# Altium PCB group11-3.PcbDoc
Units mm, origin at the board's own origin, x right, y up, seen from the top; angles counter-clockwise.
Board outline 87.88 x 127 mm, 2 copper layers (Top Layer, Bottom Layer); 48 components, 22 nets, 158 pads, 0 vias.
Unrouted connection lines stored in the file: 11.
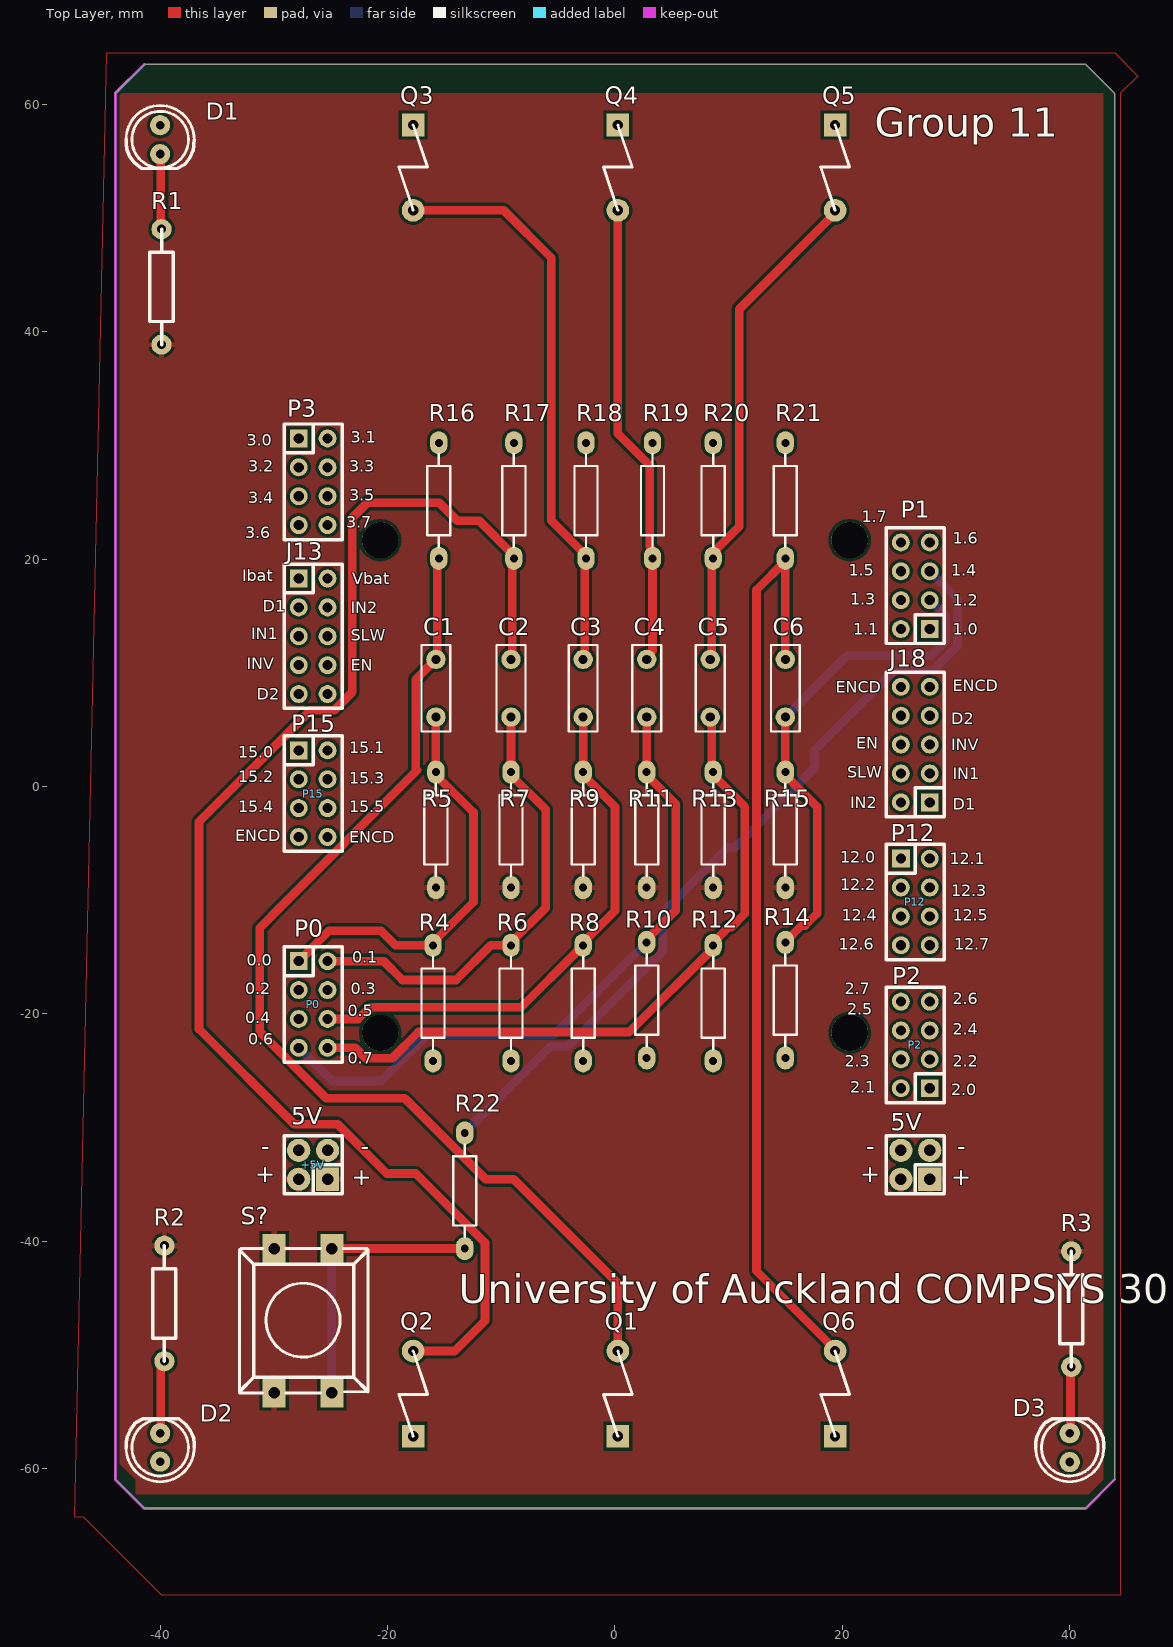
[diagram p0: Top Layer view]
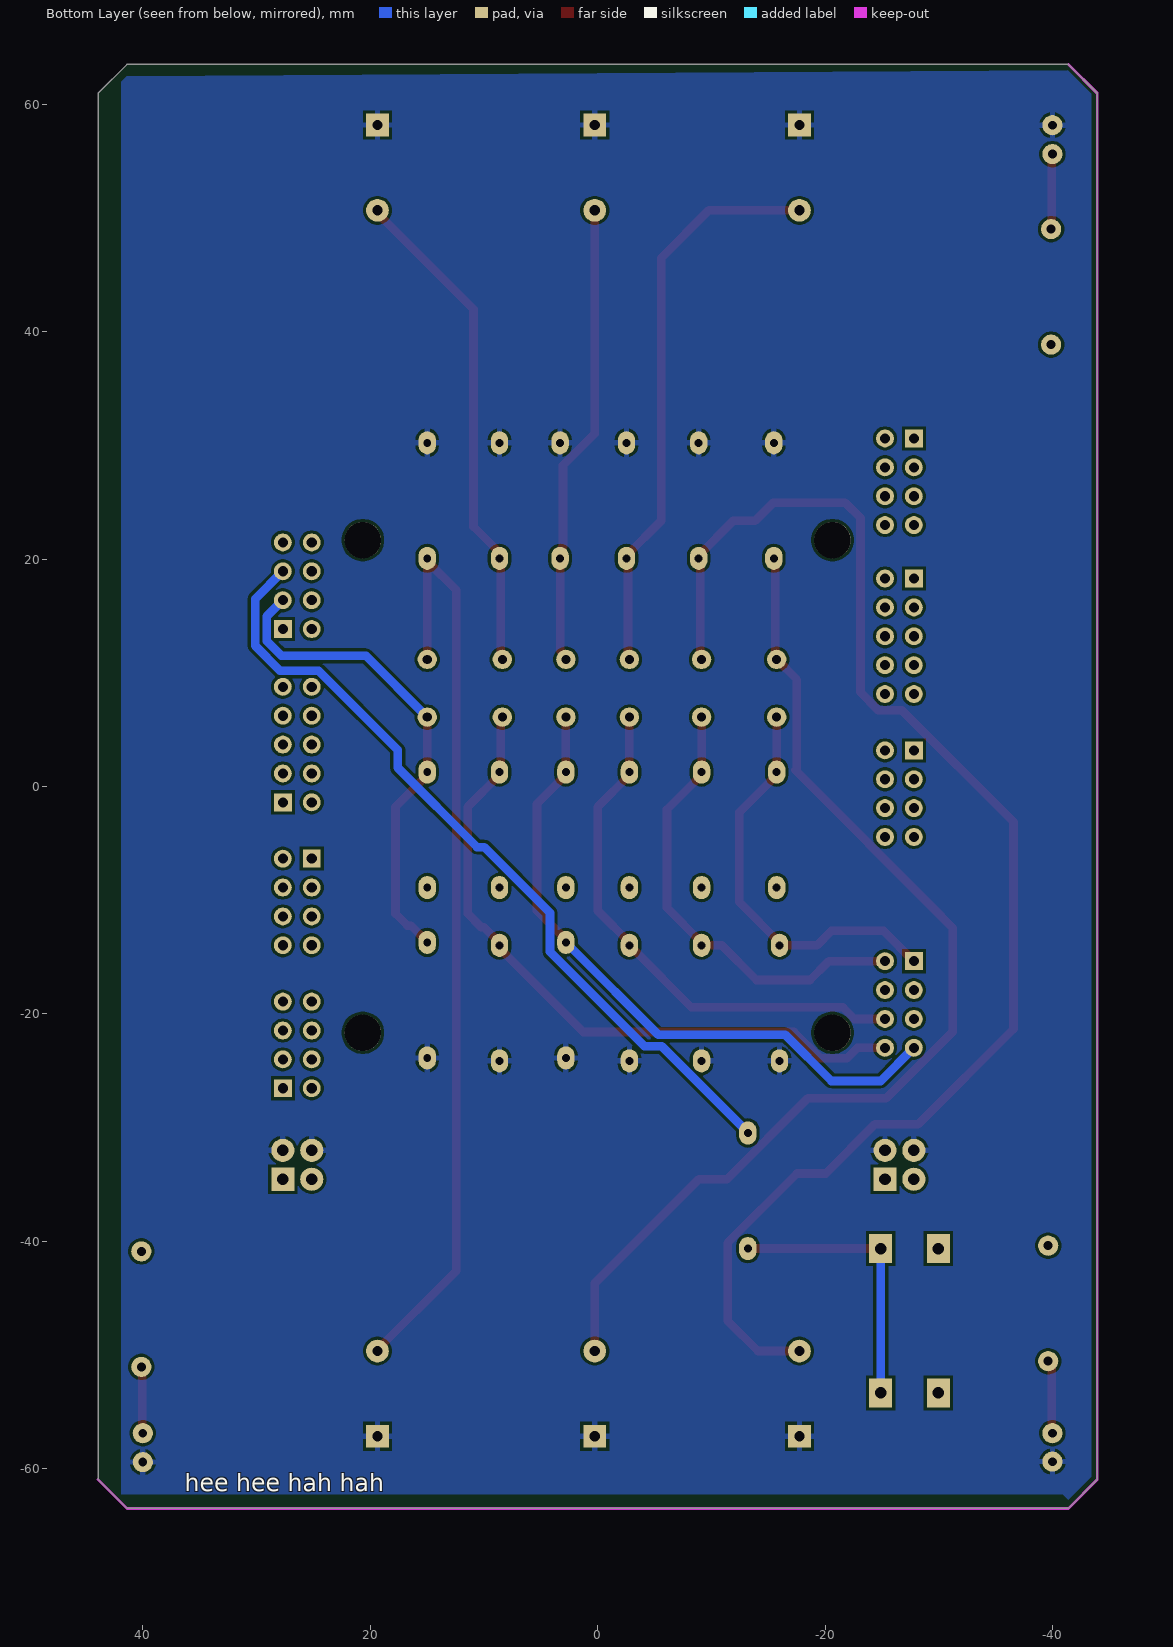
[diagram p1: Bottom Layer view, seen from below]

## Layer stack, top to bottom
Top Solder: solder mask 0.0102, Solder Resist, Dk 3.5
Top Layer: signal copper 0.0356
Dielectric1: dielectric 0.32, FR-4, Dk 4.8
Bottom Layer: signal copper 0.0356
Bottom Solder: solder mask 0.0102, Solder Resist, Dk 3.5

## Board outline
-43.942,-60.96 -41.402,-63.5 41.402,-63.5 43.942,-60.96 43.942,60.96 41.402,63.5 -41.402,63.5 -43.942,60.96

## Design rules (kind name [scope] priority, off if disabled: settings)
Clearance [All] p1: gap=0.254 ignorepadtopadclearanceinfootprint=FALSE except(0: Arc-Hole Track-Hole SMDPad-Hole THPad-Hole Via-Hole Fill-Hole Poly-Hole Region-Hole Text-Hole)
PolygonConnect [All] p1: connectstyle=Relief reliefconductorwidth=0.508 reliefentries=4 polygonreliefangle="90 Angle" airgapwidth=0.254
RoomDefinition cs301_YourGroupNumber--------------- [InComponentClass('cs301_YourGroupNumber---------------')] p1: confinementstyle=ConfineIn formatcopy=TRUE lockcomponents=FALSE outline 171.244,-65.956 182.928,-65.956 182.928,-50.716 171.244,-50.716
RoutingVias [All] p1: holewidth=0.711 width=1.27 viastyle="Through Hole" minholewidth=0.711 minwidth=1.27 maxholewidth=0.711 maxwidth=1.27
SilkToSolderMaskClearance SilkscreenOverComponentPads [IsPad] p1: minsilkscreentomaskgap=0.254 clearancetoexposedcopper=TRUE
SolderMaskExpansion [All] p1: expansion=0.102 istentingtop=FALSE
Width [All] p1: maxlimit=0.762 minlimit=0.254 preferedwidth=0.254 minimp=50.000000 maximp=50.000000 favimp=50.000000
29 further rules are at their usual default settings.

## Components (designator, comment, footprint, x,y, rotation, side; value= is the part's Value field where it differs from the comment)
5V "5V" IDC4 27.686,-34.544 r90 top locked
+5V "5V" IDC4 -25.273,-34.544 r90 top locked
C1 "*" ece-RAD0.2 -15.748,6.096 r90 top
C2 "*" ece-RAD0.2 -9.144,6.096 r90 top
C3 "*" ece-RAD0.2 -2.794,6.096 r90 top
C4 "*" ece-RAD0.2 2.794,6.096 r90 top
C5 "*" ece-RAD0.2 8.382,6.096 r90 top
C6 "*" ece-RAD0.2 14.986,6.096 r90 top
D1 "LED" LED0.1/5MM#1 -40,55.62 r180 top locked
D2 "LED" LED0.1/5MM#2 -40,-56.88 r0 top locked
D3 "LED" LED0.1/5MM#1 40,-56.88 r0 top locked
J13 "CON10" IDC10 -27.813,18.288 r270 top locked
J18 "CON10" IDC10 27.686,-1.397 r90 top locked
P0 "P0" idc8 -27.813,-15.367 r270 top locked
P1 "P1" idc8 27.686,13.843 r90 top locked
P2 "P2" idc8 27.686,-26.543 r90 top locked
P3 "P3" idc8 -27.813,30.607 r270 top locked
P12 "P12" idc8 25.146,-6.35 r270 top locked
P15 "P15" IDC8 -27.813,3.175 r270 top locked
Q1 "VEMT3700" VEMT3700 4.064,-59.69 r90 top
Q2 "VEMT3700" VEMT3700 -13.936,-59.69 r90 top
Q3 "VEMT3700" VEMT3700 -21.556,60.706 r270 top
Q4 "VEMT3700" VEMT3700 -3.556,60.706 r270 top
Q5 "VEMT3700" VEMT3700 15.556,60.706 r270 top
Q6 "VEMT3700" VEMT3700 23.176,-59.69 r90 top
R1 "RES2" AXIAL0.4 -39.878,49.022 r270 top
R2 "RES2" AXIAL0.4 -39.624,-50.546 r90 top
R3 "RES2" AXIAL0.4 40.132,-40.894 r270 top
R4 "*" ece-AXIAL0.4 -16.002,-19.05 r90 top
R5 "*" ece-AXIAL0.4 -15.748,-3.81 r270 top
R6 "*" ece-AXIAL0.4 -9.144,-19.05 r270 top
R7 "*" ece-AXIAL0.4 -9.144,-3.81 r270 top
R8 "*" ece-AXIAL0.4 -2.794,-19.05 r270 top
R9 "*" ece-AXIAL0.4 -2.794,-3.81 r270 top
R10 "*" ece-AXIAL0.4 2.794,-18.796 r270 top
R11 "*" ece-AXIAL0.4 2.794,-3.81 r270 top
R12 "*" ece-AXIAL0.4 8.636,-19.05 r270 top
R13 "*" ece-AXIAL0.4 8.636,-3.81 r270 top
R14 "*" ece-AXIAL0.4 14.986,-18.796 r270 top
R15 "*" ece-AXIAL0.4 14.986,-3.81 r270 top
R16 "*" ece-AXIAL0.4 -15.494,25.146 r270 top
R17 "*" ece-AXIAL0.4 -8.89,25.146 r270 top
R18 "*" ece-AXIAL0.4 -2.54,25.146 r270 top
R19 "*" ece-AXIAL0.4 3.302,25.146 r270 top
R20 "*" ece-AXIAL0.4 8.636,25.146 r270 top
R21 "*" ece-AXIAL0.4 14.986,25.146 r270 top
R22 "*" ece-AXIAL0.4 -13.208,-35.56 r90 top
S? "SW-PB" SW-PB -30.48,-50.8 r90 top

## Footprints (in the part's own frame and the unit in brackets; to place one, negate y for a bottom-side part, rotate by r counter-clockwise, add the part's x,y. Pads: shape width x height; smd on the part's side, far side on the other; paste and mask are expansions set on the pad)
AXIAL0.4 [mil]
  round 70 hole 31: 1(0,0) 2(400,0)
  silkscreen extent 0,-40 400,40
ece-AXIAL0.4 [mil]
  oval 80x60 hole 27.56: 1(-200,0) 2(200,0)
  silkscreen extent -160,-40 160,40
ece-RAD0.2 [mm]
  round 1.7 hole 0.8: 1(0,0) 2(5.08,0)
  silkscreen extent -1.27,-1.27 6.35,1.27
IDC4 [mil]
  rect 80x80 hole 40: 1(0,0)
  round 80 hole 40: 2(0,100) 3(100,0) 4(100,100)
  silkscreen extent -50,-50 150,150
idc8 [mil]
  rect 62x62 hole 35: 1(0,0)
  round 62 hole 35: 2(0,100) 3(100,0) 4(100,100) 5(200,0) 6(200,100) 7(300,0) 8(300,100)
  silkscreen extent -50,-50 350,150
IDC8 [mil]
  rect 62x62 hole 35: 1(0,0)
  round 62 hole 35: 2(0,100) 3(100,0) 4(100,100) 5(200,0) 6(200,100) 7(300,0) 8(300,100)
  silkscreen extent -50,-50 350,150
IDC10 [mil]
  rect 62x62 hole 35: 1(0,0)
  round 62 hole 35: 2(0,100) 3(100,0) 4(100,100) 5(200,0) 6(200,100) 7(300,0) 8(300,100) 9(400,0) 10(400,100)
  silkscreen extent -50,-50 450,150
LED0.1/5MM#1 [mil]
  round 70 hole 30: A(0,0) K(0,-100)
  silkscreen extent -118,-168 118,50
LED0.1/5MM#2 [mil]
  round 70 hole 30: A(0,0) K(0,-98.43)
  silkscreen extent -118,-168 118,50
SW-PB [mil]
  rect 100x80 hole 40: 1(-100,-20) 1(400,-20) 2(-100,-220) 2(400,-220)
  silkscreen extent -100,-345 400,100
VEMT3700 [mm]
  rect 2x2 hole 0.9: 1(2.54,3.81)
  round 2 hole 0.9: 2(10.033,3.81)
  silkscreen extent 2.54,2.54 10.03,5.08

## Part data
5V +5V: library part CON4, "Connector"
C1 C2 C3 C4 C5 C6: library part CAP, "Capacitor Non Polarised Through Hole"
J13 J18: "Connector"
P0 P1 P2 P3: library part CON8, "Connector"
P12 P15: library part CON8_1, "Connector"
Q1 Q2 Q3 Q4 Q5 Q6: "Silicon NPN Phototransistor"
R4 R5 R6 R7 R8 R9 R10 R11 R12 R13 R14 R15 R16 R17 R18 R19 R20 R21 R22: library part Res1, "Resistor", LatestRevisionDate=17-Jul-2002, LatestRevisionNote="Re-released for DXP Platform.", PackageReference=AXIAL-0.3, Published=8-Jun-2000, Publisher="Altium Limited"
S?: "Push Button Switch"

## Free pads (board coordinates)
  round 3.2 hole 3.2 unplated: 1(-20.65,-21.666) 1(-20.65,21.666) 1(20.65,-21.666) 1(20.65,21.666)

## Nets (pads, with @x,y where several pads share a name; then routed paths per layer and width w, separated by ;. In a path a pad name is that pad's centre, name@x,y a point inside that pad or via, vN(x,y) a via of type N, cw(c..) or ccw(c..) an arc to the next point about the centre after c; other vN are vias at no path point)
+5V: 5V.1 5V.2 +5V.1 +5V.2 R1.2 R2.2 R3.1 R5.2 R7.2 R9.2 R11.2 R13.2 R15.2 S?.1
GND: 5V.3 5V.4 +5V.3 +5V.4 D1.K D2.K D3.K Q1.1 Q2.1 Q3.1 Q4.1 Q5.1 Q6.1 R4.1 R6.2 R8.2 R10.2 R12.2 R14.2 R16.1 R17.1 R18.1 R19.1 R20.1 R21.1
LED1: P1.8
LED2: P1.7
LED3: P1.6
NetC1_2: C1.2 Q1.2 R16.2 | length 94.9
  Top Layer w0.762: R16.2 -15.621,19.939 -15.621,11.303 C1.2 -17.526,9.398 -17.526,1.544 -17.399,1.417 -30.226,-11.41 -30.226,-11.43 -31.242,-12.446 -31.242,-21.57 -25.38,-27.432 -18.486,-27.432 -11.374,-34.544 -8.89,-34.544 0.254,-43.688 Q1.2
NetC2_2: C2.2 Q2.2 R17.2 | length 125.2
  Top Layer w0.254: R17.2 R17.2@-8.89,20.32
  Top Layer w0.762: Q2.2@-18.068,-49.657 -14.097,-49.657 -11.43,-46.99 -11.43,-40.132 -17.526,-34.036 -20.066,-34.036 -24.384,-29.718 -28.194,-29.718 -36.576,-21.336 -36.576,-3.115 -26.755,6.706 -24.684,6.706 -23.114,8.275 -23.114,23.622 -21.778,24.958 -15.451,24.958 -13.861,23.368 -11.938,23.368 R17.2@-8.89,20.32 ; C2.2 -9.017,11.303 -9.017,19.939 R17.2
NetC3_2: C3.2 Q3.2 R18.2 | length 50.8
  Top Layer w0.762: Q3.2@-18,50.673 -9.779,50.673 -5.588,46.482 -5.588,23.368 -2.54,20.32 R18.2 -2.667,19.939 -2.667,11.303 C3.2
NetC4_2: C4.2 Q4.2 R19.2 | length 41
  Top Layer w0.762: Q4.2 0.254,31.044 3.048,28.25 3.048,21.113 3.156,21.005 3.156,20.672 3.302,20.526 R19.2 3.302,11.938 2.794,11.43 C4.2 C4.2@2.752,11.218
NetC5_2: C5.2 Q5.2 R20.2 | length 44.2
  Top Layer w0.762: C5.2 8.509,11.303 8.509,20.193 8.636,20.32 8.636,20.574 10.922,22.86 10.922,41.975 Q5.2@19.62,50.673
NetC6_2: C6.2 Q6.2 R21.2 | length 82.3
  Top Layer w0.762: C6.2 R21.2@14.986,19.812 ; R21.2 R21.2@14.986,19.812 ; Q6.2@19.496,-49.657 12.446,-42.607 12.446,17.272 R21.2@14.986,19.812
NetD1_A: D1.A R1.1 | length 6.6
  Top Layer w0.762: D1.A -39.939,55.559 -39.939,49.083 R1.1
NetD2_A: D2.A R2.1 | length 6.1
  Top Layer w0.762: D2.A -39.939,-56.819 -39.939,-50.861 R2.1@-39.878,-50.8
NetD3_A: D3.A R3.2 | length 5.9
  Top Layer w0.762: D3.A 40.066,-56.814 40.066,-51.12 R3.2
NetR22_1: R22.1 S?.2 | length 24.4
  Top Layer w0.762: S?.2@-24.892,-40.64 R22.1
  Bottom Layer w0.762: S?.2@-24.892,-53.34 S?.2@-24.892,-40.64
Sens1: C1.1 P0.1 R4.2 R5.1 | length 36.3
  Top Layer w0.762: P0.1 -25.146,-12.7 -20.574,-12.7 -19.304,-13.97 R4.2 -16.002,-13.716 -12.446,-10.16 -12.446,-2.286 -15.748,1.016 R5.1 C1.1
Sens2: C2.1 P0.2 R6.1 R7.1 | length 40.7
  Top Layer w0.762: P0.2 -20.337,-15.367 -18.686,-17.018 -13.97,-17.018 -10.922,-13.97 R6.1 -9.144,-13.716 -6.096,-10.668 -6.096,-2.032 -9.144,1.016 R7.1 C2.1
Sens3: C3.1 P0.6 R8.1 R9.1 | length 47.6
  Top Layer w0.762: P0.6 -22.592,-20.447 -21.576,-19.431 -8.255,-19.431 -3.194,-14.37 -3.146,-14.37 -2.794,-14.018 R8.1 -2.794,-13.716 0,-10.922 0,-1.778 -2.794,1.016 R9.1 C3.1
Sens4: C4.1 P0.7 R10.1 R11.1 | length 58.8
  Top Layer w0.762: R10.1 2.794,-13.462 5.334,-10.922 5.334,-1.524 2.794,1.016 R11.1 C4.1
  Bottom Layer w0.762: P0.7 -24.892,-25.908 -20.574,-25.908 -16.51,-21.844 -5.334,-21.844 2.394,-14.116 2.442,-14.116 2.794,-13.764 R10.1
Sens5: C5.1 P0.8 R12.1 R13.1 | length 61.2
  Top Layer w0.762: P0.8 -22.846,-22.987 -21.932,-23.901 -19.583,-23.901 -17.272,-21.59 1.27,-21.59 8.636,-14.224 R12.1 8.636,-13.724 9.987,-12.373 10.233,-12.373 11.43,-11.176 11.43,-1.778 8.636,1.016 R13.1 8.509,1.397 8.509,5.969 C5.1
Sens6: C6.1 P1.3 R14.1 R15.1 | length 43.4
  Top Layer w0.762: R14.1 14.986,-13.668 16.416,-12.239 16.717,-12.239 17.78,-11.176 17.78,-1.778 14.986,1.016 R15.1 C6.1
  Bottom Layer w0.762: C6.1 20.379,11.489 27.805,11.489 29.108,12.793 29.108,14.961 P1.3
SW1: P1.5 R22.2 | length 71.6
  Bottom Layer w0.762: R22.2 -13.208,-30.424 -5.644,-22.86 -4.12,-22.86 4.191,-14.549 4.191,-11.105 9.962,-5.334 10.612,-5.334 17.584,1.639 17.584,3.213 24.557,10.185 27.938,10.185 30.124,12.372 30.124,16.485 P1.5
pads on no net: J13.1 J13.2 J13.3 J13.4 J13.5 J13.6 J13.7 J13.8 J13.9 J13.10 J18.1 J18.2 J18.3 J18.4 J18.5 J18.6 J18.7 J18.8 J18.9 J18.10 P0.3 P0.4 P0.5 P1.1 P1.2 P1.4 P2.1 P2.2 P2.3 P2.4 P2.5 P2.6 P2.7 P2.8 P3.1 P3.2 P3.3 P3.4 P3.5 P3.6 P3.7 P3.8 P12.1 P12.2 P12.3 P12.4 P12.5 P12.6 P12.7 P12.8 P15.1 P15.2 P15.3 P15.4 P15.5 P15.6 P15.7 P15.8

## Polygon pours and split planes (outlines as drawn)
+5V on Top Layer "+5V_L01_P012" (solid, pour order 12): -43.688,60.96 -41.148,60.96 42.926,60.96 42.926,-60.96 41.656,-62.23 -42.164,-62.23 -42.164,-60.96 -43.688,-59.436
+5V on Top Layer "NONET_L01_P003" (solid, shelved, pour order 3): -44.704,64.516 43.942,64.516 45.974,62.484 44.45,60.96 44.45,-71.12 -39.878,-71.12 -46.736,-64.262 -47.498,-64.262
GND on Bottom Layer "GND_L02_P014" (solid, pour order 14): -41.402,62.992 -43.434,60.96 -43.434,-60.706 -41.402,-62.738 -40.894,-62.23 41.91,-62.23 41.91,61.976 41.402,62.484

## Keep-outs
Keep-Out Layer:
  lines w0.254: -41.402,63.5 -43.942,60.96 -43.942,-60.96 -41.402,-63.5 41.402,-63.5 43.942,-60.96

## Silkscreen, mask and mechanical layers (free items; w line width, h text height)
Top Overlay:
  text "Group 11" at 22.86,57.15 h2.54
  text "3.1" at -23.241,30.226 h1.02
  text "3.0" at -32.385,29.972 h1.02
  text "3.2" at -32.258,27.686 h1.02
  text "3.3" at -23.368,27.686 h1.02
  text "3.5" at -23.368,25.146 h1.02
  text "3.4" at -32.258,24.892 h1.02
  text "1.7" at 21.717,23.241 h1.02
  text "3.7" at -23.622,22.733 h1.02
  text "3.6" at -32.512,21.844 h1.02
  text "1.6" at 29.718,21.336 h1.02
  text "1.5" at 20.574,18.542 h1.02
  text "1.4" at 29.591,18.542 h1.02
  text "Ibat" at -32.766,18.034 h1.02
  text "Vbat" at -23.114,17.78 h1.02
  text "1.3" at 20.701,16.002 h1.02
  text "1.2" at 29.718,15.875 h1.02
  text "D1" at -30.988,15.367 h1.02
  text "IN2" at -23.241,15.24 h1.02
  text "1.1" at 20.955,13.335 h1.02
  text "1.0" at 29.718,13.335 h1.02
  text "IN1" at -32.004,12.954 h1.02
  text "SLW" at -23.241,12.827 h1.02
  text "INV" at -32.385,10.287 h1.02
  text "EN" at -23.241,10.16 h1.02
  text "ENCD" at 29.718,8.382 h1.02
  text "ENCD" at 19.431,8.255 h1.02
  text "D2" at -31.496,7.62 h1.02
  text "D2" at 29.591,5.461 h1.02
  text "EN" at 21.209,3.302 h1.02
  text "INV" at 29.591,3.175 h1.02
  text "15.1" at -23.368,2.921 h1.02
  text "15.0" at -33.147,2.54 h1.02
  text "SLW" at 20.447,0.762 h1.02
  text "IN1" at 29.718,0.635 h1.02
  text "15.2" at -33.147,0.381 h1.02
  text "15.3" at -23.368,0.254 h1.02
  text "IN2" at 20.701,-1.905 h1.02
  text "D1" at 29.718,-2.032 h1.02
  text "15.4" at -33.147,-2.286 h1.02
  text "15.5" at -23.368,-2.286 h1.02
  text "ENCD" at -33.401,-4.826 h1.02
  text "ENCD" at -23.368,-4.953 h1.02
  text "12.0" at 19.812,-6.731 h1.02
  text "12.1" at 29.464,-6.858 h1.02
  text "12.2" at 19.812,-9.144 h1.02
  text "12.3" at 29.591,-9.652 h1.02
  text "12.4" at 19.939,-11.811 h1.02
  text "12.5" at 29.718,-11.811 h1.02
  text "12.6" at 19.685,-14.351 h1.02
  text "12.7" at 29.845,-14.351 h1.02
  text "0.1" at -23.114,-15.494 h1.02
  text "0.0" at -32.385,-15.748 h1.02
  text "0.2" at -32.512,-18.288 h1.02
  text "0.3" at -23.241,-18.288 h1.02
  text "2.7" at 20.193,-18.288 h1.02
  text "2.6" at 29.718,-19.177 h1.02
  text "2.5" at 20.447,-20.066 h1.02
  text "0.5" at -23.495,-20.193 h1.02
  text "0.4" at -32.512,-20.828 h1.02
  text "2.4" at 29.718,-21.844 h1.02
  text "0.6" at -32.258,-22.733 h1.02
  text "0.7" at -23.495,-24.384 h1.02
  text "2.3" at 20.193,-24.638 h1.02
  text "2.2" at 29.718,-24.638 h1.02
  text "2.1" at 20.701,-26.924 h1.02
  text "2.0" at 29.591,-27.178 h1.02
  text "-" at -30.353,-31.242 h1.52 r180
  text "-" at -21.59,-31.242 h1.52 r180
  text "-" at 22.86,-31.242 h1.52 r180
  text "-" at 30.861,-31.242 h1.52 r180
  text "+" at -30.099,-35.052 h1.52 r90
  text "+" at 23.114,-35.052 h1.52 r90
  text "+" at -21.59,-35.306 h1.52 r90
  text "+" at 31.115,-35.306 h1.52 r90
  text "University of Auckland COMPSYS 301" at -13.716,-45.466 h2.54
Bottom Overlay:
  text "hee hee hah hah" at 36.322,-61.976 h1.52